# Altium PCB DUT_STM32F427VIT6TR.PcbDoc
Units mm, origin at the board's own origin, x right, y up, seen from the top; angles counter-clockwise.
Board outline 33 x 90 mm, 2 copper layers (Top Layer, Bottom Layer); 11 components, 93 nets, 288 pads, 2 vias.
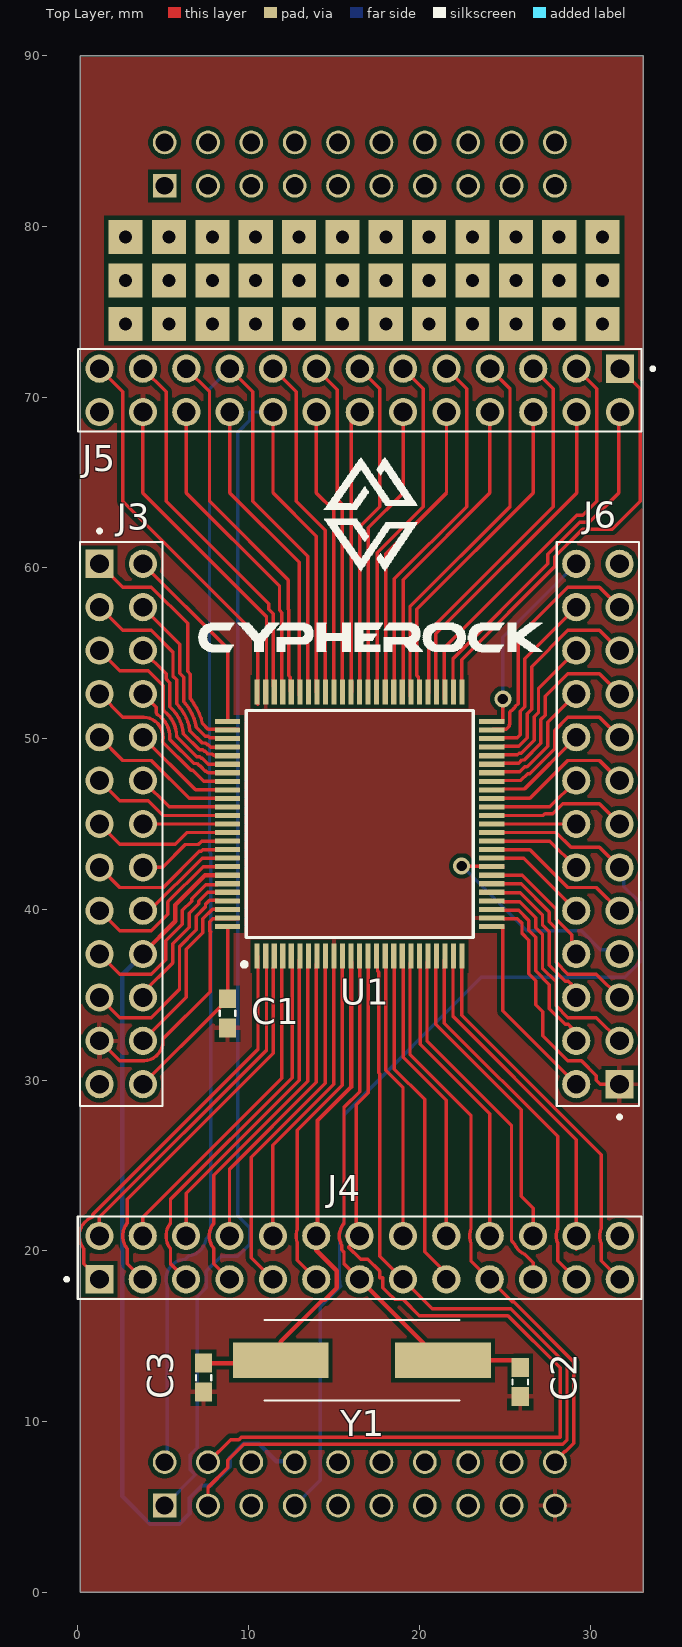
[diagram p0: Top Layer view]
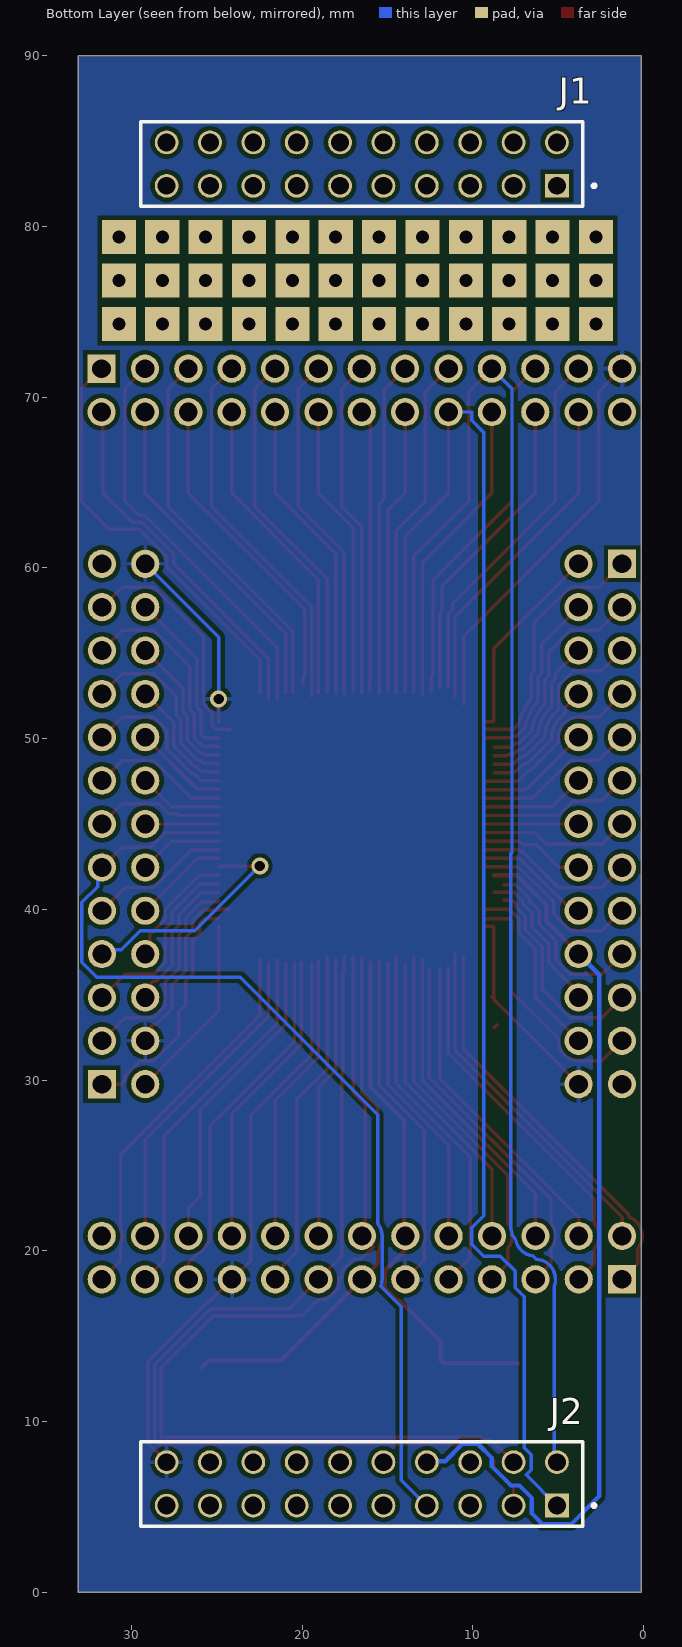
[diagram p1: Bottom Layer view, seen from below]
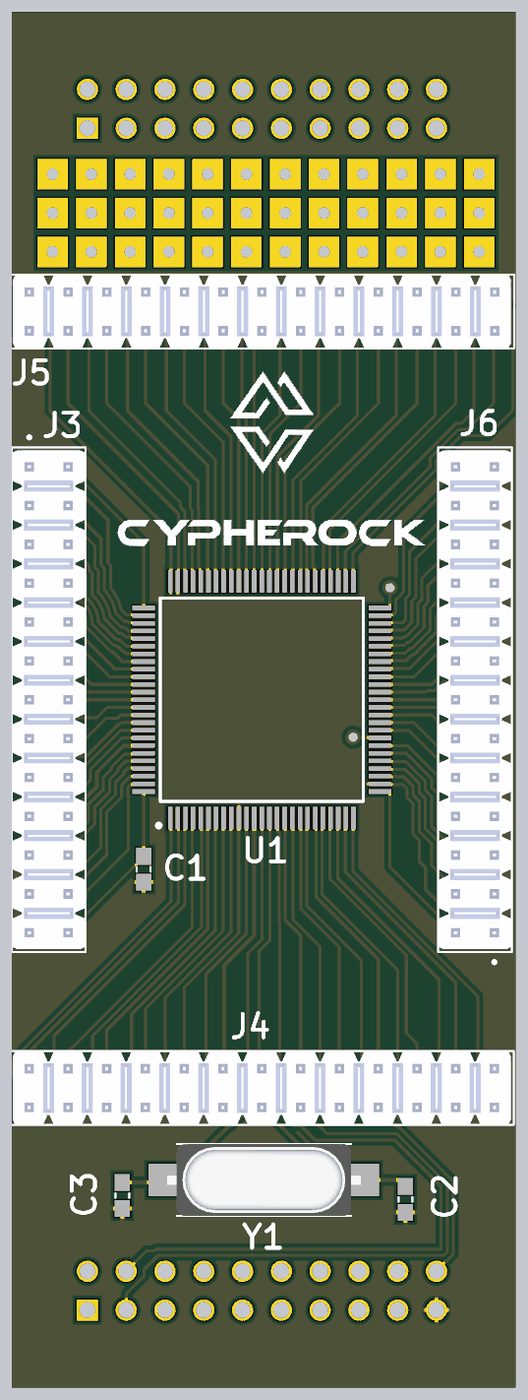
[diagram p2: 3D render of the assembled board from above, using the file's embedded part models]

## Layer stack, top to bottom
Top Solder: solder mask 0.0102, Solder Resist, Dk 3.5
Top Layer: signal copper 0.0356
Dielectric 1: dielectric 0.32, FR-4, Dk 4.8
Bottom Layer: signal copper 0.0356
Bottom Solder: solder mask 0.0102, Solder Resist, Dk 3.5

## Board outline
0.127,0 0.127,90 33.127,90 33.127,0

## Design rules (kind name [scope] priority, off if disabled: settings)
Clearance [All] p1: gap=0.254 ignorepadtopadclearanceinfootprint=FALSE except(0: Arc-Hole Track-Hole SMDPad-Hole THPad-Hole Via-Hole Fill-Hole Poly-Hole Region-Hole Text-Hole; 0.2: Arc-Arc Arc-Track Arc-SMDPad Track-Track Track-SMDPad SMDPad-SMDPad)
PolygonConnect [All] p1: connectstyle=Relief reliefconductorwidth=0.254 reliefentries=4 polygonreliefangle="90 Angle" airgapwidth=0.254
RoutingVias [All] p1: holewidth=0.711 width=1.27 viastyle="Through Hole" minholewidth=0.711 minwidth=1.27 maxholewidth=0.711 maxwidth=1.27
SolderMaskExpansion [All] p1: expansion=0.102 istentingtop=FALSE
Width [All] p1: maxlimit=0.3 minlimit=0.2 preferedwidth=0.254 minimp=50.000000 maximp=50.000000 favimp=50.000000
30 further rules are at their usual default settings.

## Components (designator, comment, footprint, x,y, rotation, side; value= is the part's Value field where it differs from the comment)
C1 "0.1uF" CAPC1608X90 8.763,33.909 r270 top
C2 "27pF" CAPC1608X90 25.908,12.319 r90 top
C3 "27pF" CAPC1608X90 7.366,12.573 r90 top
J1 "SSW-110-01-G-D-LL" SAMTEC_SSW-110-01-G-D-LL 5.08,82.38 r180 bottom
J2 "SSW-110-01-G-D-LL" SAMTEC_SSW-110-01-G-D-LL 5.08,5.08 r180 bottom
J3 "77313-818-26LF" AMPHENOL_77313-818-26LF 2.54,45 r270 top locked
J4 "77313-818-26LF" AMPHENOL_77313-818-26LF 16.5,19.6 r0 top
J5 "77313-818-26LF" AMPHENOL_77313-818-26LF 16.51,70.4 r180 top
J6 "77313-818-26LF" AMPHENOL_77313-818-26LF 30.46,45 r90 top locked
U1 "STM32F427VIT6TR" QFP50P1600X1600X160-100N 16.5,45 r90 top locked
Y1 "ABLS-8.000MHZ-B2-T" XTAL_ABLS-8.000MHZ-B2-T 16.637,13.589 r0 top

## Footprints (in the part's own frame and the unit in brackets; to place one, negate y for a bottom-side part, rotate by r counter-clockwise, add the part's x,y. Pads: shape width x height; smd on the part's side, far side on the other; paste and mask are expansions set on the pad)
AMPHENOL_77313-818-26LF [mm]
  rect 1.65x1.65 / inner round 1.65 / far side rect 1.65x1.65 hole 1.1: 01(-15.24,-1.27)
  round 1.65 hole 1.1: 02(-15.24,1.27) 03(-12.7,-1.27) 04(-12.7,1.27) 05(-10.16,-1.27) 06(-10.16,1.27) 07(-7.62,-1.27) 08(-7.62,1.27) 09(-5.08,-1.27) 10(-5.08,1.27) 11(-2.54,-1.27) 12(-2.54,1.27) 13(0,-1.27) 14(0,1.27) 15(2.54,-1.27) 16(2.54,1.27) 17(5.08,-1.27) 18(5.08,1.27) 19(7.62,-1.27) 20(7.62,1.27) 21(10.16,-1.27) 22(10.16,1.27) 23(12.7,-1.27) 24(12.7,1.27) 25(15.24,-1.27) 26(15.24,1.27)
  silkscreen extent -17.26,-2.41 16.51,2.41, body extent -16.31,-2.41 16.31,2.41, height 8.37
CAPC1608X90 [mm]
  rect 1.1x1 smd: 1(-0.85,0) 2(0.85,0)
  silkscreen extent -0.15,-0.45 0.15,0.45
QFP50P1600X1600X160-100N [mm]
  rect 1.475x0.3 smd: 1(-7.738,6) 2(-7.738,5.5) 3(-7.738,5) 4(-7.738,4.5) 5(-7.738,4) 6(-7.738,3.5) 7(-7.738,3) 8(-7.738,2.5) 9(-7.738,2) 10(-7.738,1.5) 11(-7.738,1) 12(-7.738,0.5) 13(-7.738,0) 14(-7.738,-0.5) 15(-7.738,-1) 16(-7.738,-1.5) 17(-7.738,-2) 18(-7.738,-2.5) 19(-7.738,-3) 20(-7.738,-3.5) 21(-7.738,-4) 22(-7.738,-4.5) 23(-7.738,-5) 24(-7.738,-5.5) 25(-7.738,-6) 51(7.738,-6) 52(7.738,-5.5) 53(7.738,-5) 54(7.738,-4.5) 55(7.738,-4) 56(7.738,-3.5) 57(7.738,-3) 58(7.738,-2.5) 59(7.738,-2) 60(7.738,-1.5) 61(7.738,-1) 62(7.738,-0.5) 63(7.738,0) 64(7.738,0.5) 65(7.738,1) 66(7.738,1.5) 67(7.738,2) 68(7.738,2.5) 69(7.738,3) 70(7.738,3.5) 71(7.738,4) 72(7.738,4.5) 73(7.738,5) 74(7.738,5.5) 75(7.738,6)
  rect 0.3x1.475 smd: 26(-6,-7.738) 27(-5.5,-7.738) 28(-5,-7.738) 29(-4.5,-7.738) 30(-4,-7.738) 31(-3.5,-7.738) 32(-3,-7.738) 33(-2.5,-7.738) 34(-2,-7.738) 35(-1.5,-7.738) 36(-1,-7.738) 37(-0.5,-7.738) 38(0,-7.738) 39(0.5,-7.738) 40(1,-7.738) 41(1.5,-7.738) 42(2,-7.738) 43(2.5,-7.738) 44(3,-7.738) 45(3.5,-7.738) 46(4,-7.738) 47(4.5,-7.738) 48(5,-7.738) 49(5.5,-7.738) 50(6,-7.738) 76(6,7.738) 77(5.5,7.738) 78(5,7.738) 79(4.5,7.738) 80(4,7.738) 81(3.5,7.738) 82(3,7.738) 83(2.5,7.738) 84(2,7.738) 85(1.5,7.738) 86(1,7.738) 87(0.5,7.738) 88(0,7.738) 89(-0.5,7.738) 90(-1,7.738) 91(-1.5,7.738) 92(-2,7.738) 93(-2.5,7.738) 94(-3,7.738) 95(-3.5,7.738) 96(-4,7.738) 97(-4.5,7.738) 98(-5,7.738) 99(-5.5,7.738) 100(-6,7.738)
  silkscreen extent -8.35,-6.65 6.65,6.87
SAMTEC_SSW-110-01-G-D-LL [mm]
  rect 1.39x1.39 hole 1.04: 01(0,0)
  round 1.39 hole 1.04: 02(0,2.54) 03(-2.54,0) 04(-2.54,2.54) 05(-5.08,0) 06(-5.08,2.54) 07(-7.62,0) 08(-7.62,2.54) 09(-10.16,0) 10(-10.16,2.54) 11(-12.7,0) 12(-12.7,2.54) 13(-15.24,0) 14(-15.24,2.54) 15(-17.78,0) 16(-17.78,2.54) 17(-20.32,0) 18(-20.32,2.54) 19(-22.86,0) 20(-22.86,2.54)
  silkscreen extent -24.39,-1.21 2.27,3.75
XTAL_ABLS-8.000MHZ-B2-T [mm]
  rect 5.6x2.1 smd: 1(-4.75,0) 2(4.75,0)
  silkscreen extent -5.7,-2.35 5.7,2.35, body extent -6.35,-2.35 6.35,2.35, height 4.06

## Part data
C1: library part CC0603MRX5R7BB106, "CAP CER 10UF 16V X5R 0603", Package=None, Availability=Unavailable, MP=CC0603MRX5R7BB106, Price=None
C2 C3: library part CC0603MRX5R7BB106, "0603", Package=None, Availability=Unavailable, MP=CC0603MRX5R7BB106, Price=None
J1 J2: Package=None, Availability=Unavailable, MF="Samtec Inc.", MP=SSW-110-01-G-D-LL, Price=None
J3 J4 J5 J6: "BergStik, Board to Board connector, Unshrouded Header, 2.54 mm Pitch, Vertical, Double Row,Through Hole, 26 Positions", Package=None, Check_prices=https://www.snapeda.com/parts/77313-818-26LF/Amphenol+FCI/view-part/?ref=eda, MF="Amphenol ICC (FCI)", MP=77313-818-26LF, SnapEDA_Link=https://www.snapeda.com/parts/77313-818-26LF/Amphenol+FCI/view-part/?ref=snap
U1: "MCU 32-bit ARM Cortex M4 RISC 2MB Flash 2.5V/3.3V 100-Pin LQFP T/R", Manufacturer_Name=STMicroelectronics, Mouser Part Number=511-STM32F427VIT6TR, Datasheet Link=https://componentsearchengine.com/Datasheets/1/STM32F427VIT6TR.pdf, Geometry.Height=1.6mm, Manufacturer_Part_Number=STM32F427VIT6TR, Mouser Price/Stock=https://www.mouser.co.uk/ProductDetail/STMicroelectronics/STM32F427VIT6TR?qs=4b8myOmUP%252Bvu%2FF%2FjMaGQJg%3D%3D
Y1: "HC/49US (AT49) SMD LOW PROFILE CRYSTAL", Package="HC49/US Abracon", Availability="In Stock", Check_prices=https://www.snapeda.com/parts/ABLS-8.000MHZ-B2-T/Abracon+LLC/view-part/?ref=eda, MF="Abracon LLC", MP=ABLS-8.000MHZ-B2-T, Price=None, Purchase-URL=https://pricing.snapeda.com/search/part/ABLS-8.000MHZ-B2-T/?ref=eda, SnapEDA_Link=https://www.snapeda.com/parts/ABLS-8.000MHZ-B2-T/Abracon+LLC/view-part/?ref=snap

## Free pads (board coordinates)
  rect 2x2 hole 0.762: 17(2.794,74.295) 17(2.794,76.835) 17(2.794,79.375) 17(5.334,74.295) 17(5.334,76.835) 17(5.334,79.375) 17(7.874,74.295) 17(7.874,76.835) 17(7.874,79.375) 17(10.414,74.295) 17(10.414,76.835) 17(10.414,79.375) 17(12.954,74.295) 17(12.954,76.835) 17(12.954,79.375) 17(15.494,74.295) 17(15.494,76.835) 17(15.494,79.375) 17(18.034,74.295) 17(18.034,76.835) 17(18.034,79.375) 17(20.574,74.295) 17(20.574,76.835) 17(20.574,79.375) 17(23.114,74.295) 17(23.114,76.835) 17(23.114,79.375) 17(25.654,74.295) 17(25.654,76.835) 17(25.654,79.375) 17(28.194,74.295) 17(28.194,76.835) 17(28.194,79.375) 17(30.734,74.295) 17(30.734,76.835) 17(30.734,79.375)

## Via types
v1: diameter 1, hole 0.6, Top Layer to Bottom Layer, tented top, 2 vias

## Nets (pads, with @x,y where several pads share a name; then routed paths per layer and width w, separated by ;. In a path a pad name is that pad's centre, name@x,y a point inside that pad or via, vN(x,y) a via of type N, cw(c..) or ccw(c..) an arc to the next point about the centre after c; other vN are vias at no path point)
3V3: C1.1 J2.20 J3.26 J4.11 J4.19 J5.25 J6.04 J6.26 U1.11 U1.19 U1.28 U1.50 U1.75 U1.100 | length 111.3
  Top Layer w0.2: J5.25 2.631,70.309 2.631,63.901 10.541,55.991 10.541,51.998 ; J3.26 8.176,34.126 8.769,34.719 8.769,38.95 8.819,39 U1.100@9.407,39 ; C1.1 C1.1@8.89,34.886 ; J4.11 12.849,19.441 12.849,20.475 cw(c13.96,20.87) 12.849,21.264 12.849,27.05 15.494,29.695 U1.11@15.494,36.993 ; U1.19@19.45,36.851 19.45,31.506 23.023,27.933 23.023,21.302 ccw(c24.12,20.87) 23.023,20.438 23.023,19.427 25.441,17.009 25.524,17.009 29.046,13.487 29.046,8.738 28.577,8.269 28.532,8.269 27.94,7.677 J2.20 ; U1.28 U1.28@24.883,40 ; U1.28@24.883,39.95 25.81,39.95 26.411,39.349 26.411,38.769 26.811,38.369 26.811,36.395 27.611,35.595 27.611,34.186 28.536,33.261 28.726,33.261 28.913,33.074 28.913,32.577 J6.04 ; U1.50@24.883,51 24.883,52.315 v1(24.892,52.324)
  Bottom Layer w0.2: v1(24.892,52.324) 24.892,55.942 J6.26
GND: J2.17
GNDA: C1.2 C2.1 C3.1 J2.19 J3.23 J4.10 J5.24 J6.01 U1.10 U1.27 U1.74 U1.99 | length 66.4
  Top Layer w0.2: J3.23 2.449,31.121 3.689,31.121 3.695,31.127 ccw(c3.81,32.3) 4.983,32.415 7.747,35.179 7.747,38.652 7.773,38.677 7.724,38.726 7.724,39.274 7.9,39.45 8.545,39.45 9.357,39.45 U1.99@9.407,39.5 ; J5.24 3.81,64.389 11.049,57.15 U1.74@11.049,52.48 ; C1.2@8.587,33.235 C1.2 ; J4.10 11.42,26.187 14.986,29.753 U1.10@14.986,36.867 ; U1.27@24.883,39.5 24.933,39.45 25.745,39.45 26.011,39.184 26.011,38.603 26.411,38.203 26.411,36.229 26.811,35.829 26.811,34.42 27.223,34.008 27.223,32.599 28.702,31.121 29.496,31.121 30.369,30.248 30.369,29.996 30.605,29.76 J6.01
NetC2_2: C2.2 J4.13 U1.13 Y1.2 | length 31.3
  Top Layer w0.2: J4.13 15.585,19.245 15.585,19.917 15.449,20.053 15.449,20.336 cw(c16.5,20.87) 15.347,20.623 ccw(c15.152,20.58) 15.309,20.704 15.309,21.036 ccw(c15.152,21.16) 15.347,21.117 cw(c16.5,20.87) 15.585,21.614 15.585,28.401 16.51,29.326 U1.13@16.51,37.128
  Top Layer w0.254: J4.13 21.241,13.589 Y1.2 25.488,13.589 C2.2
NetC3_2: C3.2 J4.12 U1.12 Y1.1 | length 30.5
  Top Layer w0.254: C3.2 11.721,13.423 Y1.1 11.887,14.681 14.33,17.124 14.46,17.124 15.166,17.83 15.166,18.83 13.96,20.036 J4.12 ; J4.12@14.035,21.021 14.035,27.632 16.002,29.599 U1.12@16.002,36.888
NetJ2_01: J2.01 J5.18 U1.68 | length 86.3
  Top Layer w0.2: J5.18 11.43,64.389 13.97,61.849 U1.68@13.97,52.722
  Bottom Layer w0.2: J2.01 6.878,6.878 6.571,7.185 6.571,8.055 6.985,8.469 6.985,17.308 7.519,17.842 7.519,18.818 8.392,19.691 9.368,19.691 10.059,20.382 10.059,21.358 9.368,22.049 9.368,67.951 9.378,67.951 10.069,68.642 10.069,69.13 J5.18
NetJ2_02: J2.02 J5.19 U1.69 | length 87
  Top Layer w0.2: J5.19 10.251,70.309 10.251,63.901 13.462,60.69 U1.69@13.462,52.696
  Bottom Layer w0.2: J2.02 5.243,7.783 5.243,17.898 cw(c6.34,18.33) 6.3,19.508 6.493,19.701 ccw(c6.34,20.87) 7.509,20.717 7.702,20.91 cw(c8.88,20.87) 7.783,21.302 7.783,43.271 7.711,43.343 7.711,70.491 J5.19@9.012,71.792
NetJ2_03: J2.03 J4.15 U1.15 | length 59.1
  Top Layer w0.2: J2.03 7.62,6.136 8.787,7.303 8.787,7.73 9.725,8.669 23.624,8.669 28.412,8.669 28.646,8.903 28.646,12.502 28.646,13.322 25.359,16.609 24.539,16.609 20.761,16.609 J4.15 17.679,19.691 17.679,30.376 17.634,30.421 17.634,36.316 17.55,36.4 17.55,37.212 U1.15
NetJ2_04: J2.04 J4.14 U1.14 | length 60.1
  Top Layer w0.2: J2.04 8.946,8.946 9.437,8.946 9.56,9.069 15.328,9.069 28.246,9.069 28.246,13.156 25.193,16.209 19.986,16.209 19.044,17.151 18.552,17.151 18.161,17.542 17.861,17.842 17.861,18.415 17.679,18.415 17.679,18.818 16.988,19.509 16.559,19.509 15.849,20.219 J4.14 15.709,20.87 16.382,20.988 16.313,21.057 16.313,28.562 17.018,29.268 U1.14@17.018,37.202
NetJ2_07: J2.07 J6.11 U1.37 | length 58.8
  Top Layer w0.2: U1.37@24.883,44.5 28.023,44.5 28.884,43.639 30.551,43.639 J6.11
  Bottom Layer w0.2: J2.07 14.191,6.571 14.191,16.731 15.391,17.931 cw(c16.5,18.33) 15.321,18.33 15.321,20.87 cw(c16.5,20.87) 15.585,21.614 15.585,27.982 23.622,36.019 32.036,36.019 32.909,36.892 32.909,40.408 31.982,41.335 31.982,42.208 J6.11
NetJ2_08: J2.08 J3.20 U1.94 | length 53.7
  Top Layer w0.254: J3.20 3.81,37.418 5.698,39.306 5.698,40.256 7.441,42 U1.94
  Bottom Layer w0.254: J3.20 2.594,36.164 2.594,5.637 4.227,4.004 5.933,4.004 6.544,4.615 6.544,5.526 7.271,6.253 7.775,6.253 8.89,7.368 8.89,7.872 9.714,8.696 10.606,8.696 11.624,7.678 12.642,7.678 J2.08
NetJ3_01: J3.01 U1.77 | length 14.9
  Top Layer w0.2: J3.01 2.631,58.879 4.298,58.879 6.424,56.754 6.424,53.936 6.589,53.771 6.589,52.335 cw(c3.81,50.08) 7.302,50.864 7.62,50.546 U1.77@9.361,50.546
NetJ3_02: J3.02 U1.76 | length 11.9
  Top Layer w0.2: J3.02 8.769,55.281 8.769,51.05 8.819,51 U1.76@9.407,51
NetJ3_03: J3.03 U1.79 | length 12.9
  Top Layer w0.2: J3.03 2.631,56.339 4.298,56.339 5.57,55.068 5.57,53.659 5.789,53.44 5.789,52.031 cw(c3.81,50.08) 6.561,50.474 7.289,49.746 7.473,49.746 7.569,49.65 7.627,49.65 7.777,49.5 U1.79
NetJ3_04: J3.04 U1.78 | length 10.9
  Top Layer w0.2: J3.04 5.97,55.54 5.97,53.825 6.189,53.605 6.189,52.189 cw(c3.81,50.08) 6.935,50.666 7.454,50.146 7.639,50.146 7.735,50.05 U1.78@9.357,50.05
NetJ3_05: J3.05 U1.81 | length 11.5
  Top Layer w0.2: J3.05 2.449,53.981 4.116,53.981 4.989,53.108 4.989,51.767 4.989,51.7 5.03,51.646 ccw(c5.189,51.767) 5.061,51.613 cw(c3.81,50.08) 5.789,50.115 6.957,48.946 7.142,48.946 7.237,48.851 7.284,48.85 7.338,48.796 7.634,48.5 U1.81
NetJ3_06: J3.06 U1.80 | length 8.9
  Top Layer w0.2: J3.06 5.17,53.8 5.17,53.493 5.389,53.274 5.389,51.865 5.446,51.807 ccw(c5.589,51.947) 5.45,51.803 cw(c3.81,50.08) 6.18,50.289 7.123,49.346 7.308,49.346 7.404,49.25 7.461,49.25 7.518,49.193 7.611,49.1 7.85,49.1 7.9,49.05 cw(c7.89,48.85) 8.023,49 U1.80
NetJ3_07: J3.07 U1.83 | length 10.6
  Top Layer w0.2: J3.07 2.631,51.259 3.542,51.259 cw(c3.544,51.059) 3.559,51.258 3.645,51.252 ccw(c3.661,51.451) 3.682,51.252 cw(c3.81,50.08) 4.974,49.895 4.974,49.88 4.974,49.797 6.626,48.146 6.718,48.146 7.364,47.5 U1.83@9.407,47.5
NetJ3_08: J3.08 U1.82 | length 7.4
  Top Layer w0.2: J3.08 4.589,51.841 4.589,51.564 ccw(c4.789,51.565) 4.68,51.398 cw(c3.81,50.08) 5.388,50.035 5.388,50.032 5.388,49.949 6.792,48.546 6.976,48.546 7.072,48.45 7.119,48.45 7.173,48.396 7.468,48.1 7.526,48.1 7.583,48.043 7.626,48 U1.82
NetJ3_09: J3.09 U1.85 | length 9.6
  Top Layer w0.2: J3.09 2.631,48.719 4.298,48.719 6.517,46.5 U1.85@9.407,46.5
NetJ3_10: J3.10 U1.84 | length 6.9
  Top Layer w0.2: J3.10 6.89,47 U1.84@9.407,47
NetJ3_11: J3.11 U1.87 | length 9
  Top Layer w0.2: J3.11 2.449,46.361 4.116,46.361 4.977,45.5 U1.87@9.407,45.5
NetJ3_12: J3.12 U1.86 | length 6.2
  Top Layer w0.2: J3.12 5.35,46 U1.86@9.407,46
NetJ3_13: J3.13 U1.89 | length 8.9
  Top Layer w0.2: J3.13 2.449,43.821 5.706,43.821 6.385,44.5 U1.89@9.407,44.5
NetJ3_14: J3.14 U1.88 | length 5.6
  Top Layer w0.2: J3.14 U1.88@9.407,45
NetJ3_15: J3.15 U1.91 | length 9.5
  Top Layer w0.2: J3.15 2.449,41.281 4.987,41.281 7.106,43.4 7.222,43.4 7.322,43.5 U1.91@9.407,43.5
NetJ3_16: J3.16 U1.90 | length 6.2
  Top Layer w0.2: J3.16 4.959,42.46 6.299,43.8 7.056,43.8 7.256,44 U1.90@9.407,44
NetJ3_17: J3.17 U1.93 | length 10.6
  Top Layer w0.2: J3.17 2.449,38.741 4.298,38.741 5.271,39.713 5.271,40.433 7.337,42.5 8.092,42.5 U1.93@9.407,42.5
NetJ3_18: J3.18 U1.92 | length 6.9
  Top Layer w0.2: J3.18 4.192,39.92 7.272,43 8.026,43 U1.92@9.407,43
NetJ3_19: J3.19 U1.95 | length 10.8
  Top Layer w0.2: J3.19 2.449,36.201 4.298,36.201 5.15,37.053 5.15,38.154 6.125,39.129 6.125,39.937 6.674,40.486 6.674,40.629 7.495,41.45 U1.95@8.173,41.45
NetJ3_21: J3.21 U1.97 | length 12.3
  Top Layer w0.2: J3.21 2.449,33.661 4.298,33.661 5.95,35.313 5.95,37.823 6.924,38.797 6.924,39.606 7.474,40.155 7.474,40.298 7.708,40.532 U1.97@8.198,40.532
NetJ3_22: J3.22 U1.96 | length 8.9
  Top Layer w0.2: J3.22 3.81,35.119 5.55,36.859 5.55,37.989 6.525,38.963 6.525,39.771 7.074,40.321 7.074,40.463 7.611,41 U1.96
NetJ3_24: J3.24 U1.98 | length 10.9
  Top Layer w0.2: J3.24 6.35,34.84 6.35,37.657 7.324,38.632 7.324,39.44 7.885,40 U1.98@9.407,40
NetJ4_01: J4.01 U1.1 | length 23.9
  Top Layer w0.2: J4.01@1.406,18.184 0.345,19.245 0.345,20.126 cw(c1.26,20.87) 0.86,21.979 0.86,22.127 10.55,31.817 10.55,36.458 U1.1@10.55,37.262
NetJ4_02: J4.02 U1.2 | length 20.6
  Top Layer w0.2: J4.02 1.26,21.961 11.049,31.75 U1.2@11.049,37.405
NetJ4_03: J4.03 U1.3 | length 22.6
  Top Layer w0.2: J4.03@4,18.13 2.885,19.245 2.885,20.126 cw(c3.8,20.87) 2.885,21.614 2.885,23.02 11.303,31.438 11.449,31.584 11.449,36.399 11.45,36.4 U1.3@11.45,36.576
NetJ4_04: J4.04 U1.4 | length 19.1
  Top Layer w0.2: J4.04 3.8,21.961 11.938,30.099 11.938,36.388 11.95,36.4 U1.4@11.95,36.561
NetJ4_05: J4.05 U1.5 | length 21.9
  Top Layer w0.2: J4.05@6.503,18.167 5.425,19.245 5.425,20.126 cw(c6.34,20.87) 5.425,21.614 5.425,23.02 12.554,30.149 12.554,36.396 12.55,36.4 12.55,36.523
NetJ4_06: J4.06 U1.6 | length 18.9
  Top Layer w0.2: J4.06 6.34,23.37 12.954,29.984 U1.6@12.954,37.039
NetJ4_07: J4.07 U1.7 | length 22
  Top Layer w0.2: J4.07@9.178,18.032 7.965,19.245 7.965,20.126 cw(c8.88,20.87) 7.965,21.614 7.965,24.429 13.462,29.926 U1.7@13.462,37.158
NetJ4_08: J4.08 U1.8 | length 18
  Top Layer w0.2: J4.08 8.88,24.778 13.97,29.868 U1.8@13.97,36.777
NetJ4_09: J4.09 U1.9 | length 21.3
  Top Layer w0.2: J4.09 10.16,19.59 10.16,21.209 10.16,25.493 14.478,29.811 U1.9@14.478,37.27
NetJ4_16: J4.16 U1.16 | length 16.8
  Top Layer w0.2: U1.16@18.034,37.075 18.034,30.586 19.04,29.58 J4.16@19.04,20.734
NetJ4_17: J4.17 U1.17 | length 19.9
  Top Layer w0.2: U1.17@18.542,37.195 18.542,30.644 20.32,28.866 20.32,19.939 J4.17@21.681,18.578
NetJ4_18: J4.18 U1.18 | length 17.4
  Top Layer w0.2: U1.18@19.05,37 19.05,31.34 21.58,28.81 J4.18@21.58,20.6
NetJ4_20: J4.20 U1.20 | length 17.2
  Top Layer w0.2: U1.20@20.05,36.881 20.05,36.4 20.05,32.11 24.13,28.03 J4.20@24.13,21.4
NetJ4_21: J4.21 U1.21 | length 21.2
  Top Layer w0.2: U1.21@20.45,36.9 20.45,32.276 25.4,27.326 25.4,20.574 25.582,20.392 ccw(c26.66,20.87) 26.182,19.792 26.66,19.314 J4.21
NetJ4_22: J4.22 U1.22 | length 18.3
  Top Layer w0.2: U1.22@20.955,36.818 20.955,33.282 25.963,28.274 25.963,23.186 26.66,22.489 J4.22
NetJ4_23: J4.23 U1.23 | length 22.3
  Top Layer w0.2: U1.23@21.463,37.039 21.463,33.34 28.103,26.7 28.103,21.302 ccw(c29.2,20.87) 28.103,20.438 28.103,19.427 J4.23@29.489,18.041
NetJ4_24: J4.24 U1.24 | length 19.8
  Top Layer w0.2: U1.24@21.971,36.872 21.971,33.729 29.2,26.5 J4.24@29.2,20.087
NetJ4_25: J4.25 U1.25 | length 23.1
  Top Layer w0.2: U1.25@22.479,37.123 22.479,33.787 30.643,25.623 30.643,21.302 ccw(c31.74,20.87) 30.643,20.438 30.643,19.427 J4.25@32.048,18.022
NetJ5_01: J5.01 U1.51 | length 24.8
  Top Layer w0.2: U1.51@22.479,52.669 22.479,54.631 27.93,60.081 27.93,60.647 29.556,62.274 31.302,62.274 32.929,63.901 32.929,70.491 J5.01
NetJ5_02: J5.02 U1.52 | length 21.2
  Top Layer w0.2: U1.52@21.971,52.307 21.971,54.688 27.53,60.247 27.53,60.813 29.391,62.674 29.956,62.674 31.672,64.389 31.672,69.052 J5.02
NetJ5_03: J5.03 U1.53 | length 23.7
  Top Layer w0.2: U1.53@21.463,52.315 21.463,55.312 29.225,63.074 29.562,63.074 30.389,63.901 30.389,70.491 J5.03
NetJ5_04: J5.04 U1.54 | length 19.9
  Top Layer w0.2: U1.54@20.955,52.696 20.955,56.134 29.21,64.389 J5.04
NetJ5_05: J5.05 U1.55 | length 22.5
  Top Layer w0.2: U1.55@20.55,52.687 20.55,53.493 20.55,56.295 27.849,63.594 27.849,70.491 J5.05
NetJ5_06: J5.06 U1.56 | length 18.9
  Top Layer w0.2: U1.56@19.95,53.136 19.95,53.6 19.85,53.7 19.85,57.569 26.67,64.389 J5.06
NetJ5_07: J5.07 U1.57 | length 22.1
  Top Layer w0.2: U1.57@19.45,52.479 19.45,57.735 25.309,63.594 25.309,70.491 J5.07
NetJ5_08: J5.08 U1.58 | length 18.6
  Top Layer w0.2: U1.58@19.05,52.645 19.05,59.309 24.13,64.389 J5.08
NetJ5_09: J5.09 U1.59 | length 21.2
  Top Layer w0.2: U1.59@18.542,52.687 18.542,59.367 22.769,63.594 22.769,70.491 J5.09
NetJ5_10: J5.10 U1.60 | length 17.9
  Top Layer w0.2: U1.60@18.034,52.654 18.034,60.833 21.59,64.389 J5.10
NetJ5_11: J5.11 U1.61 | length 20.7
  Top Layer w0.2: U1.61@17.526,52.611 17.526,60.891 20.229,63.594 20.229,70.491 J5.11
NetJ5_12: J5.12 U1.62 | length 17.2
  Top Layer w0.2: U1.62@17.018,52.73 17.018,62.357 19.05,64.389 J5.12
NetJ5_13: J5.13 U1.63 | length 20
  Top Layer w0.2: U1.63@16.51,52.662 16.51,62.415 17.689,63.594 17.689,70.491 J5.13
NetJ5_14: J5.14 U1.64 | length 16.6
  Top Layer w0.2: U1.64@16.05,52.738 16.05,53.333 16.002,53.381 16.002,68.622 J5.14
NetJ5_15: J5.15 U1.65 | length 19.7
  Top Layer w0.2: J5.15 15.196,70.444 15.196,64.035 15.494,63.738 U1.65@15.494,52.645
NetJ5_16: J5.16 U1.66 | length 16.8
  Top Layer w0.2: J5.16 13.97,64.389 14.986,63.373 U1.66@14.986,52.797
NetJ5_17: J5.17 U1.67 | length 20.3
  Top Layer w0.2: J5.17 12.791,70.309 12.791,63.901 14.478,62.214 U1.67@14.478,52.645
NetJ5_20: J5.20 U1.70 | length 18.3
  Top Layer w0.2: J5.20 8.89,64.389 12.954,60.325 U1.70@12.954,52.536
NetJ5_21: J5.21 U1.71 | length 21.4
  Top Layer w0.2: J5.21 7.711,70.309 7.711,63.901 12.319,59.293 12.319,57.577 12.35,57.546 12.35,53.7 12.45,53.6 U1.71@12.45,52.775
NetJ5_22: J5.22 U1.72 | length 18.5
  Top Layer w0.2: J5.22 6.35,64.389 11.811,58.928 11.811,57.519 11.95,57.38 U1.72@11.95,52.996
NetJ5_23: J5.23 U1.73 | length 21.8
  Top Layer w0.2: J5.23 5.171,70.309 5.171,63.901 11.176,57.896 11.176,57.589 11.449,57.316 11.449,53.601 11.45,53.6 U1.73@11.45,53.062
NetJ6_02: J6.02 U1.26 | length 11
  Top Layer w0.2: U1.26@24.883,39 24.883,34.067 J6.02
NetJ6_03: J6.03 U1.29 | length 12.6
  Top Layer w0.2: U1.29@24.883,40.5 24.933,40.45 25.876,40.45 26.811,39.515 26.811,38.935 27.211,38.535 27.211,36.56 28.011,35.76 28.011,34.352 28.702,33.661 30.369,33.661 J6.03
NetJ6_05: J6.05 U1.31 | length 11.1
  Top Layer w0.2: U1.31@24.883,41.5 25.957,41.5 27.611,39.846 27.611,39.266 28.011,38.866 28.011,36.892 28.702,36.201 30.369,36.201 J6.05
NetJ6_06: J6.06 U1.30 | length 8.6
  Top Layer w0.2: U1.30@24.883,41 24.912,40.971 25.921,40.971 27.211,39.681 27.211,39.1 27.611,38.7 27.611,36.726 28.536,35.801 28.726,35.801 28.913,35.614 28.913,35.117 J6.06
NetJ6_07: J6.07 U1.33 | length 13.8
  Top Layer w0.2: v1(22.479,42.545) 22.501,42.523 24.86,42.523 U1.33@24.883,42.5
  Bottom Layer w0.2: v1(22.479,42.545) 26.283,38.741 29.496,38.741 30.605,37.632 31.478,37.632 J6.07
NetJ6_08: J6.08 U1.32 | length 7.1
  Top Layer w0.2: U1.32@24.883,42 26.023,42 28.011,40.012 28.011,39.432 28.938,38.505 28.938,37.632 J6.08
NetJ6_09: J6.09 U1.35 | length 8.3
  Top Layer w0.2: U1.35@24.883,43.5 26.483,43.5 28.702,41.281 30.369,41.281 J6.09
NetJ6_10: J6.10 U1.34 | length 5.6
  Top Layer w0.2: U1.34@24.883,43 26.11,43 J6.10
NetJ6_12: J6.12 U1.36 | length 4.9
  Top Layer w0.2: U1.36@24.883,44 27.65,44 J6.12
NetJ6_13: J6.13 U1.39 | length 7.6
  Top Layer w0.2: U1.39@24.883,45.5 27.26,45.5 27.36,45.6 27.816,45.6 28.395,46.179 30.551,46.179 J6.13
NetJ6_14: J6.14 U1.38 | length 4.3
  Top Layer w0.2: U1.38@24.883,45 J6.14
NetJ6_15: J6.15 U1.41 | length 8.3
  Top Layer w0.2: U1.41@24.883,46.5 26.483,46.5 28.702,48.719 30.551,48.719 J6.15
NetJ6_16: J6.16 U1.40 | length 4.9
  Top Layer w0.2: U1.40@24.883,46 27.65,46 J6.16
NetJ6_17: J6.17 U1.43 | length 9.5
  Top Layer w0.2: U1.43@24.883,47.5 24.933,47.55 25.942,47.55 26.342,47.95 26.473,47.95 27.92,49.397 27.92,50.478 28.702,51.259 30.551,51.259 J6.17
NetJ6_18: J6.18 U1.42 | length 5.6
  Top Layer w0.2: U1.42@24.883,47 24.933,47.05 26.16,47.05 J6.18
NetJ6_19: J6.19 U1.45 | length 11
  Top Layer w0.2: U1.45@24.883,48.5 24.933,48.55 25.81,48.55 26.01,48.75 26.142,48.75 27.12,49.729 27.12,51.12 27.381,51.38 27.381,52.478 28.702,53.799 30.551,53.799 J6.19
NetJ6_20: J6.20 U1.44 | length 7
  Top Layer w0.2: U1.44@24.883,48 24.933,48.05 25.876,48.05 26.176,48.35 26.308,48.35 27.52,49.563 27.52,50.95 J6.20
NetJ6_21: J6.21 U1.47 | length 12.5
  Top Layer w0.2: U1.47@24.883,49.5 24.933,49.55 25.81,49.55 26.321,50.06 26.321,51.451 26.581,51.712 26.581,54.218 28.702,56.339 30.551,56.339 J6.21
NetJ6_22: J6.22 U1.46 | length 8.5
  Top Layer w0.2: U1.46@24.883,49 24.933,49.05 25.745,49.05 25.845,49.15 25.976,49.15 26.721,49.894 26.721,51.285 26.981,51.546 26.981,52.951 J6.22
NetJ6_23: J6.23 U1.49 | length 14.2
  Top Layer w0.2: U1.49 24.288,50.55 25.1,50.55 25.276,50.726 25.276,50.827 25.283,50.834 25.283,51.545 25.327,51.589 ccw(c24.892,52.324) 25.627,51.889 25.781,52.043 25.781,55.958 28.702,58.879 30.551,58.879 J6.23
NetJ6_24: J6.24 U1.48 | length 10
  Top Layer w0.2: U1.48@24.883,50 24.933,50.05 25.745,50.05 25.921,50.226 25.921,51.607 ccw(c24.892,52.324) 25.942,51.638 26.181,51.877 26.181,54.691 J6.24
pads on no net: J1.01 J1.02 J1.03 J1.04 J1.05 J1.06 J1.07 J1.08 J1.09 J1.10 J1.11 J1.12 J1.13 J1.14 J1.15 J1.16 J1.17 J1.18 J1.19 J1.20 J2.05 J2.06 J2.09 J2.10 J2.11 J2.12 J2.13 J2.14 J2.15 J2.16 J2.18 J3.25 J4.26 J5.26 J6.25

## Polygon pours and split planes (outlines as drawn)
3V3 on Bottom Layer "3V3_L02_P001" (solid, remove dead copper, pour order 1): 0.127,89.916 0.127,0 33.147,0 33.147,89.916
GNDA on Top Layer "GNDA_L01_P000" (solid, remove dead copper, pour order 0): 0.127,89.916 0.127,0 33.147,0 33.147,89.916

## Silkscreen, mask and mechanical layers (free items; w line width, h text height)
Top Overlay:
  drawing of 11 lines, arcs and shapes, not listed